# Altium PCB Motor Unit Rev 3.PcbDoc
Units mil, origin at the board's own origin, x right, y up, seen from the top; angles counter-clockwise.
Board outline 2000 x 3000 mil, 4 copper layers (Top Layer, 5V, GND, Bottom Layer), stack 23.756 mil thick; 85 components, 62 nets, 308 pads, 59 vias.
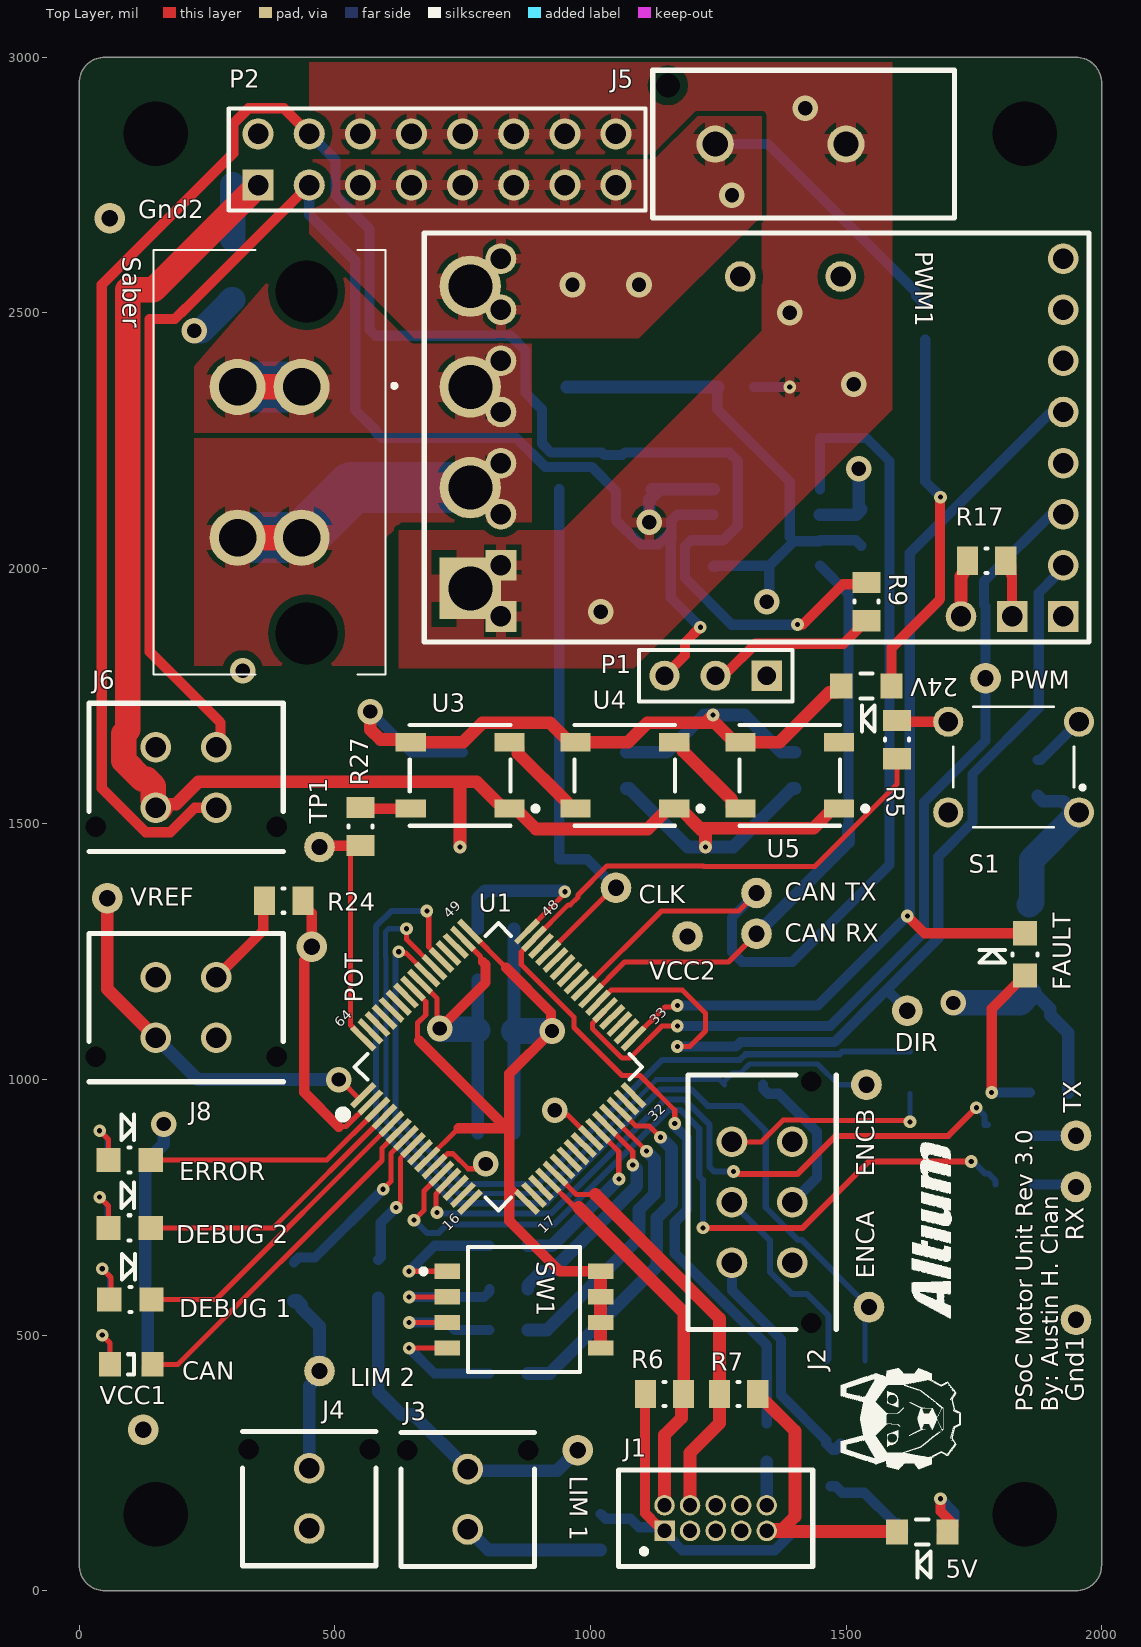
[diagram p0: Top Layer view]
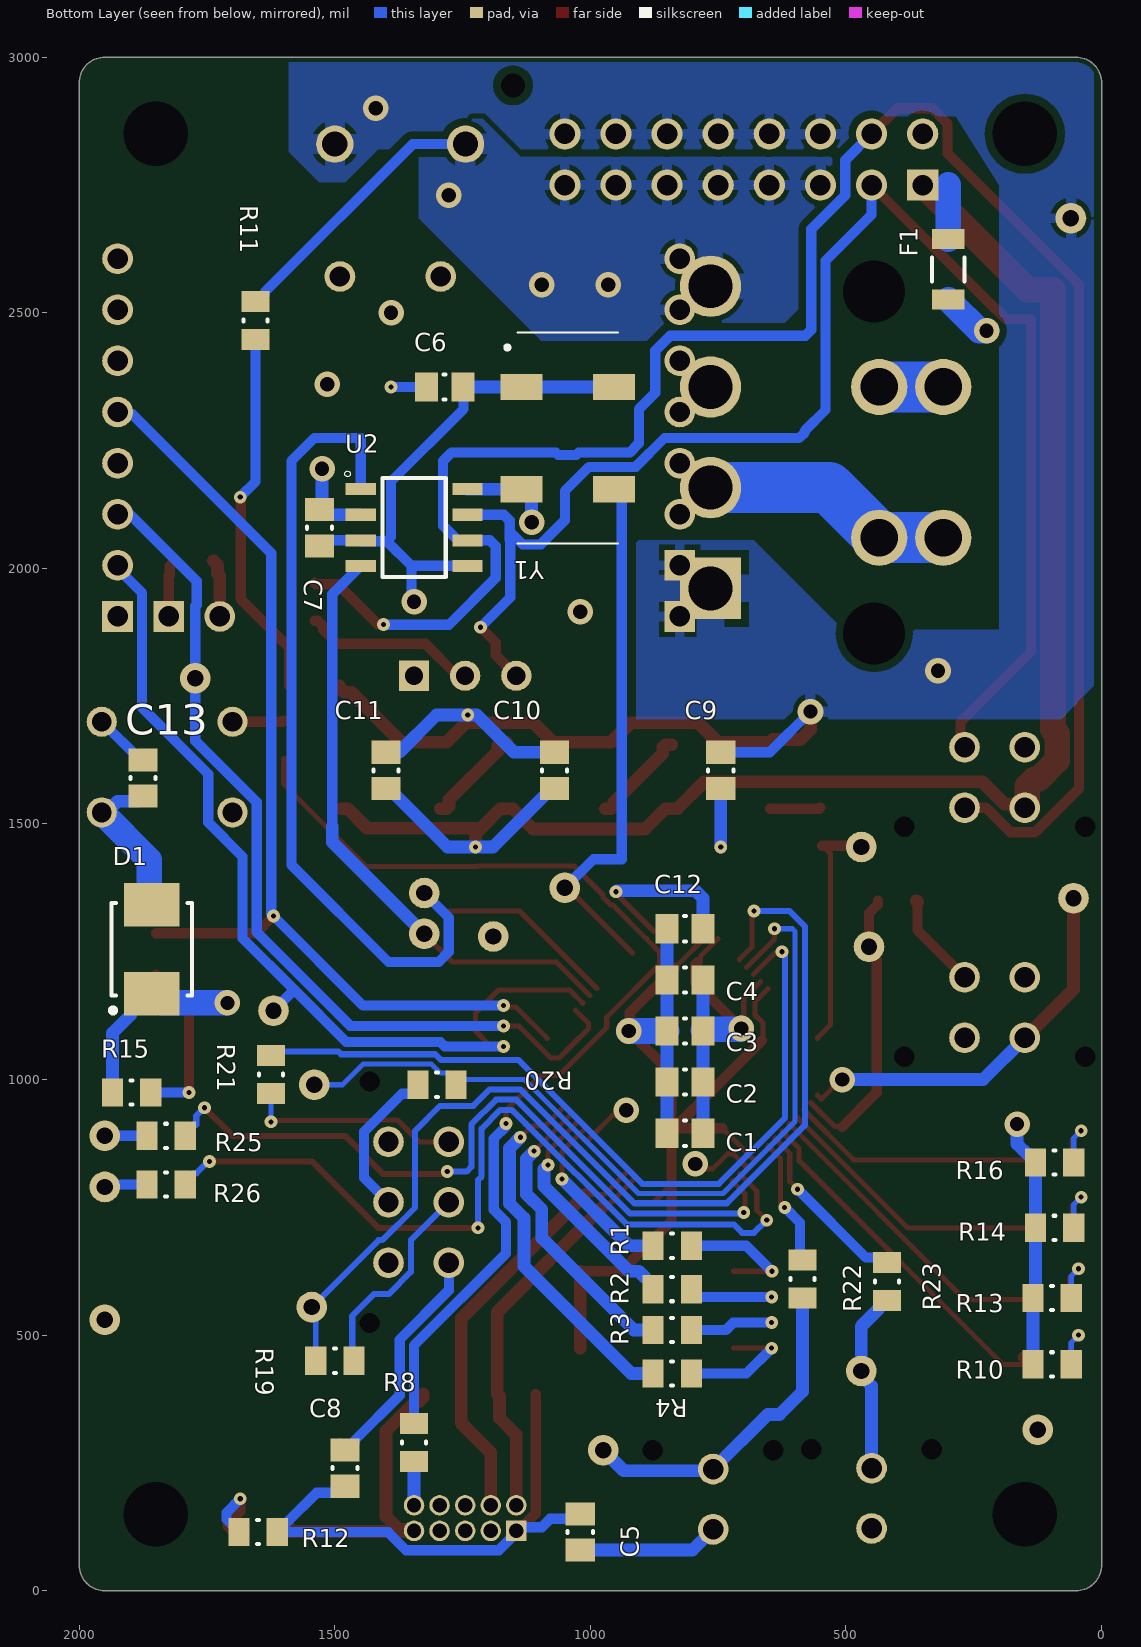
[diagram p1: Bottom Layer view, seen from below]
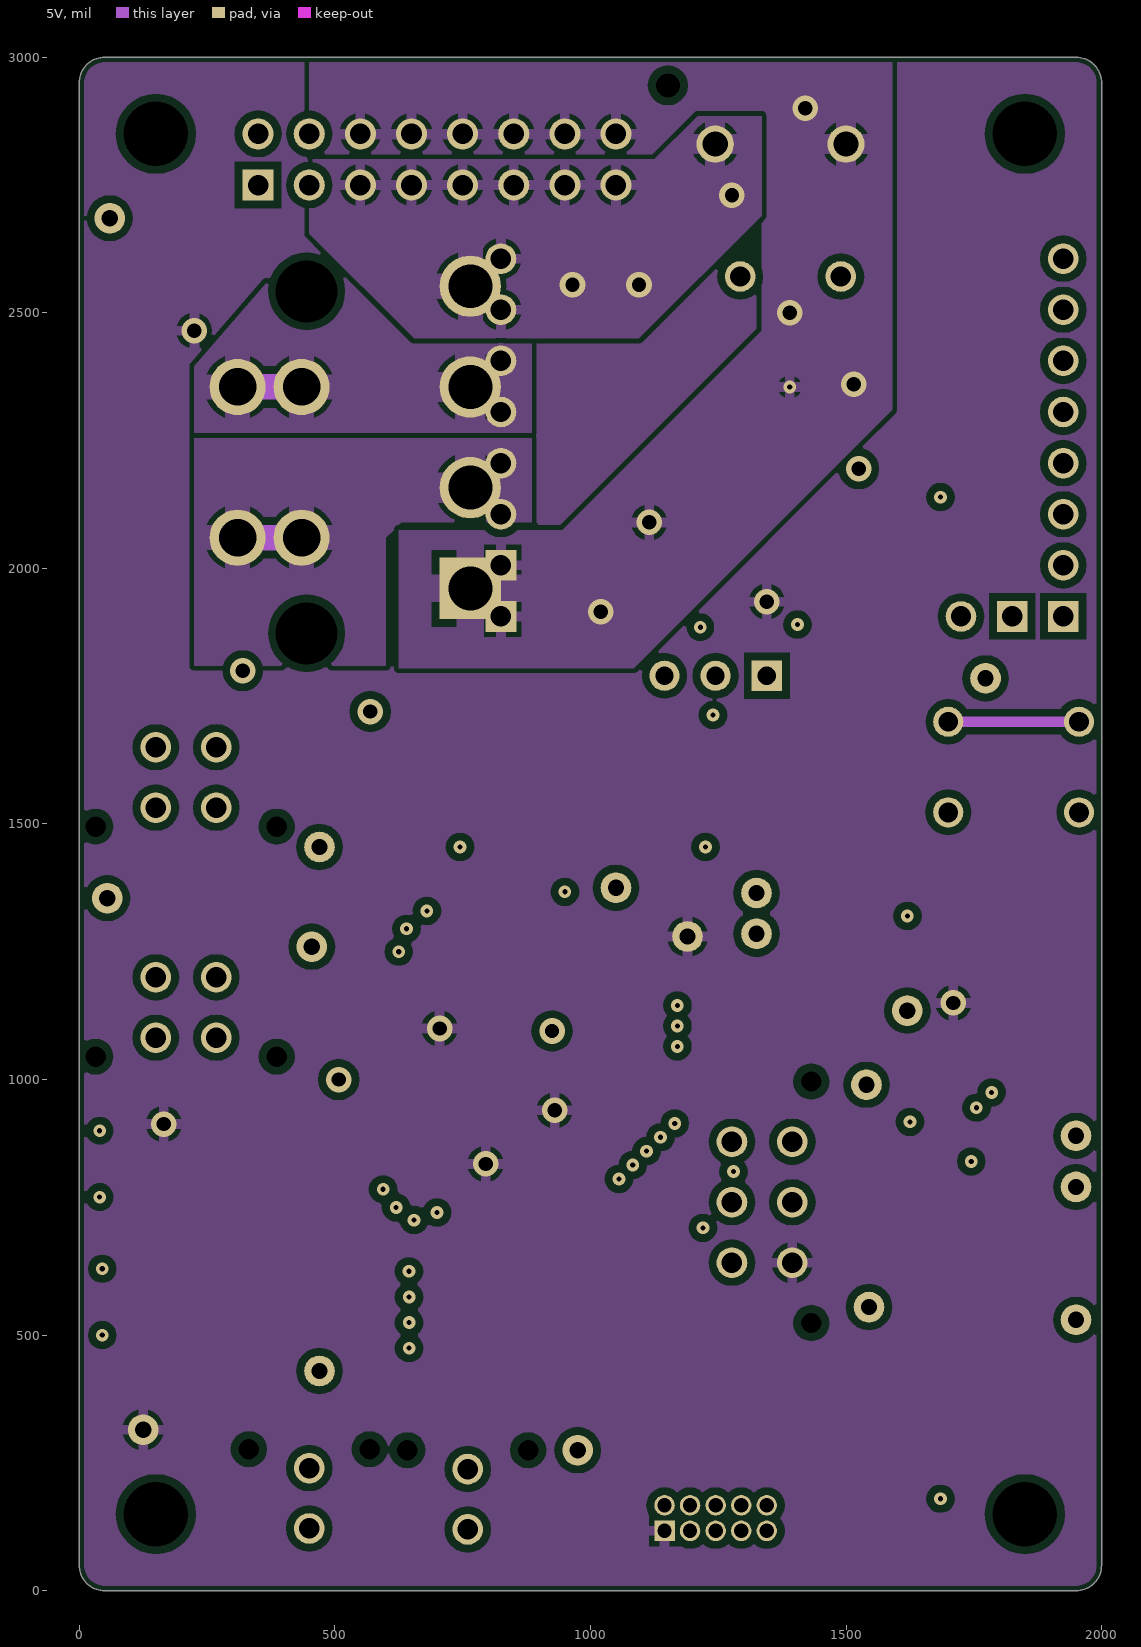
[diagram p2: 5V]
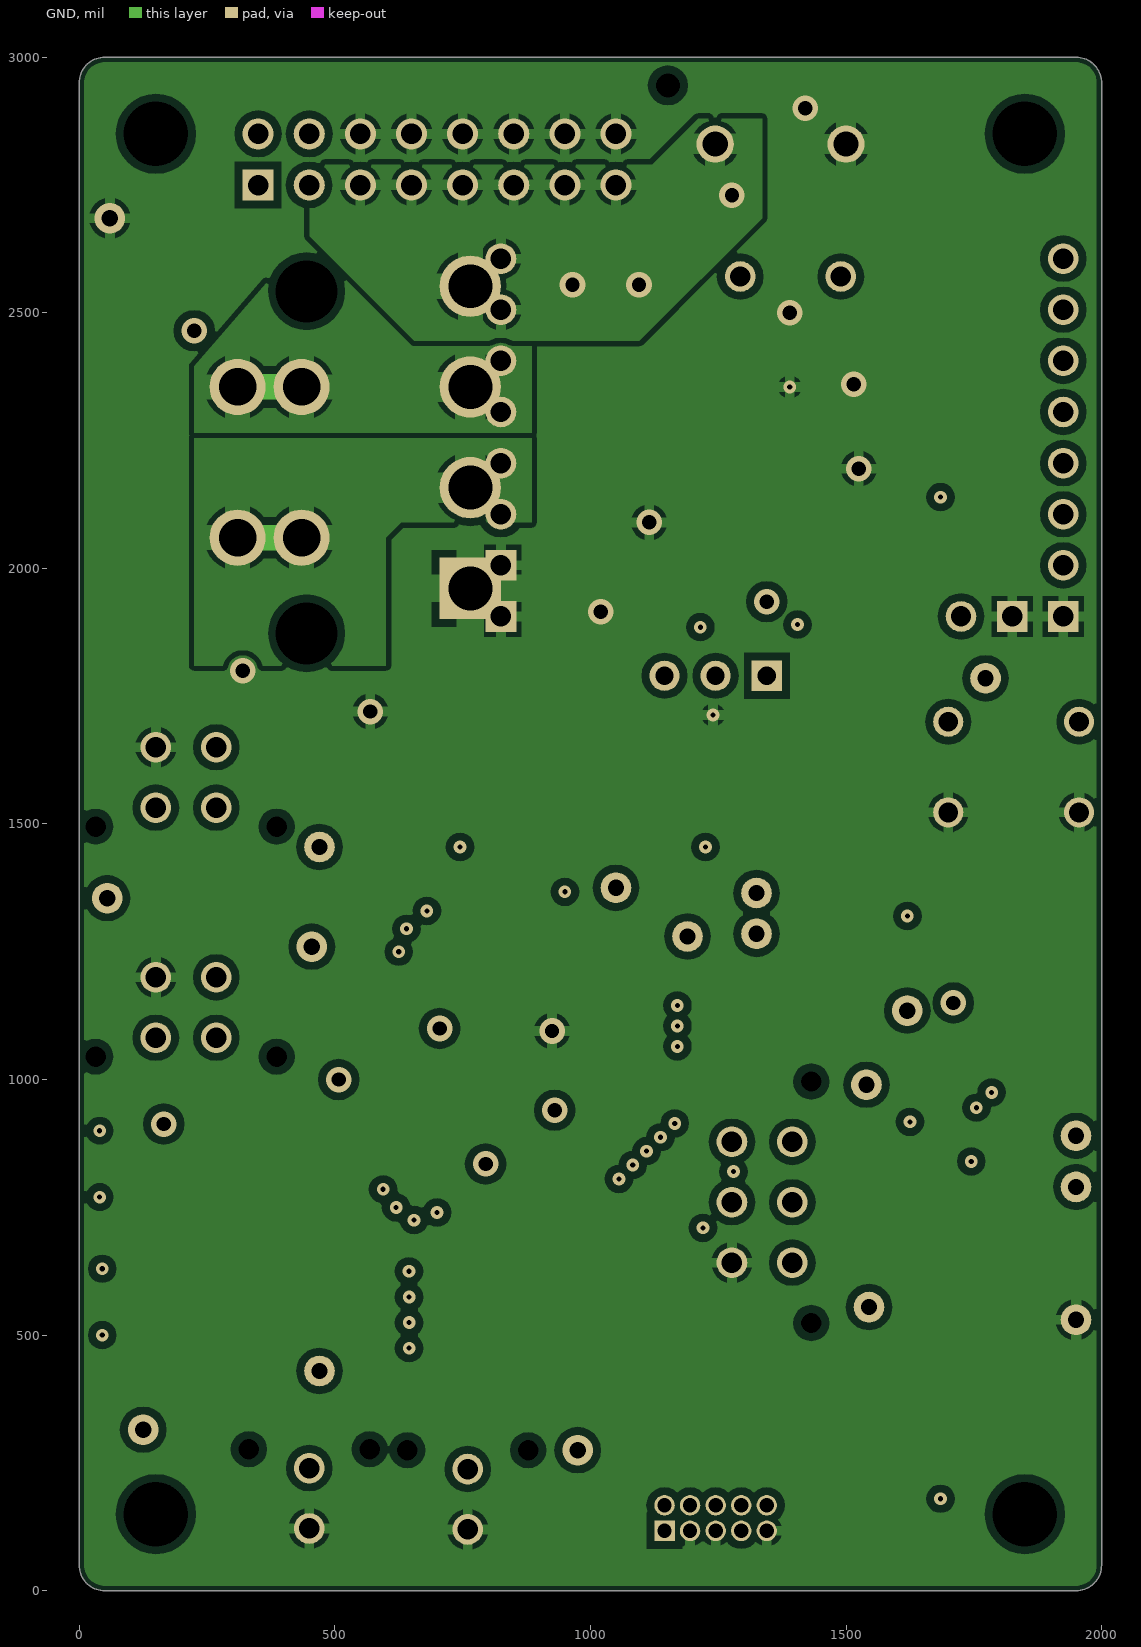
[diagram p3: GND]

## Layer stack, top to bottom
Top Solder: solder mask 0.4, Solder Resist, Dk 3.5
Top Layer: signal copper 1.4
Dielectric 2: prepreg 2.8, PP-006, Dk 4.1
5V: signal copper 1.3779
Dielectric 1: dielectric 12.6, FR-4, Dk 4.8
GND: signal copper 1.3779
Dielectric 3: prepreg 2.8, PP-006, Dk 4.1
Bottom Layer: signal copper 1.4
Bottom Solder: solder mask 0.4, Solder Resist, Dk 3.5

## Board outline
50,0 1950,0 ccw(c1950,50) 2000,50 2000,2950 ccw(c1950,2950) 1950,3000 50,3000 ccw(c50,2950) 0,2950 0,50 ccw(c50,50)

## Design rules (kind name [scope] priority, off if disabled: settings)
BoardOutlineClearance [All] p1: gap=10 ignorepadtopadclearanceinfootprint=FALSE
Clearance [All] p1: gap=5 ignorepadtopadclearanceinfootprint=TRUE except(0: Arc-Hole Track-Hole SMDPad-Hole THPad-Hole Via-Hole Fill-Hole Poly-Hole Region-Hole Text-Hole; 8: Track-Track Track-SMDPad Track-THPad Track-Via; 10: Poly-Poly; 15: Arc-Poly Track-Poly SMDPad-Poly THPad-Poly Via-Poly Fill-Poly)
ComponentClearance [All] p1: gap=0 collisioncheckmode=3 verticalgap=100000 showdistances=FALSE
Height [All] p1: minheight=0 maxheight=2000 prefheight=500
HoleSize [All] p1: absolutevalues=TRUE maxlimit=200 minlimit=10 maxpercent=80.000 minpercent=20.000
MinimumAnnularRing [All] p1: minimumring=6
MinimumSolderMaskSliver [All] p1: minsoldermaskwidth=5
PlaneConnect [All] p1: planeconnectstyle=Relief reliefexpansion=20 reliefentries=4 reliefconductorwidth=20 reliefairgap=10
PolygonConnect [All] p1: connectstyle=Relief reliefconductorwidth=20 reliefentries=4 polygonreliefangle="90 Angle" airgapwidth=10
RoutingVias [All] p1: holewidth=10 width=25 viastyle="Through Hole" minholewidth=10 minwidth=25 maxholewidth=28 maxwidth=50
SilkToSolderMaskClearance [IsPad] p1: minsilkscreentomaskgap=5 clearancetoexposedcopper=TRUE
SolderMaskExpansion [All] p1: expansion=4
Width [All] p1: maxlimit=200 minlimit=5 preferedwidth=25 minimp=50.000000 maximp=50.000000 favimp=50.000000
24 further rules are at their usual default settings.

## Classes and differential pairs
component class "Standard Header": C8 D1 ENCA ENCB F1 J2 J3 J4 J5 J6 J8 "LIM 1" "LIM 2" P2 POT R19 R20 R21 R22 R23 R24 R25 R26 RX TX VREF
component class "PSoC Connections": C1 C2 C3 C4 C5 C6 C12 C13 CLK Gnd1 Gnd2 J1 R5 R6 R7 R8 S1 U1 VCC1 VCC2 Y1
component class "Motor Controller": DIR PWM PWM1 R17 Saber
component class LEDs: 5V 24V C9 C10 C11 CAN "DEBUG 1" "DEBUG 2" ERROR FAULT R10 R11 R12 R13 R14 R15 R16 R27 TP1 U3 U4 U5
component class "DIP Switch": R1 R2 R3 R4 SW1
component class CAN: C7 "CAN RX" "CAN TX" P1 R9 U2

## Components (designator, comment, footprint, x,y, rotation, side; value= is the part's Value field where it differs from the comment)
5V "LTST-C170YKT" LTST-C170YKT_V 1649.21,115 r180 top
24V "LTST-C170YKT" LTST-C170YKT_V 1540,1770 r180 top
C1 "10uF" CAPC0805(2012)130_N 815,895 r180 bottom value=390pF
C2 "10uF" CAPC0805(2012)130_N 815,995 r180 bottom value=390pF
C3 ".1uF" CAPC0805(2012)130_N 815,1095 r180 bottom value=390pF
C4 ".1uF" CAPC0805(2012)130_N 815,1195 r180 bottom value=390pF
C5 ".1uF" CAPC0805(2012)130_N 1020,115 r90 bottom value=390pF
C6 ".1uF" CAPC0805(2012)130_N 1285,2355 r0 bottom value=390pF
C7 ".1uF" CAPC0805(2012)130_N 1530,2079.57 r270 bottom value=390pF
C8 ".1uF" CAPC0805(2012)130_N 1480,240 r90 bottom value=390pF
C9 ".1uF" CAPC0805(2012)130_N 745,1605 r270 bottom value=390pF
C10 ".1uF" CAPC0805(2012)130_N 1070,1605 r270 bottom value=390pF
C11 ".1uF" CAPC0805(2012)130_N 1400,1605 r270 bottom value=390pF
C12 "1uF" CAPC0805(2012)130_N 815,1295 r0 bottom value=390pF
C13 ".1uF" CAPC0805(2012)130_N 1875,1590 r270 bottom value=390pF
CAN "CAN" 0805_A 101.69,443 r180 top
"CAN RX" "Test Point" "Test Point Through-hole" 1300,1305 r270 top
"CAN TX" "Test Point" "Test Point Through-hole" 1350,1345 r90 top
CLK "Test Point" "Test Point Through-hole" 1070,1400 r180 top
D1 "5.1V" ONSC-SMB-2-403A-03_H_V 1858.17,1255 r90 bottom
"DEBUG 1" "LTST-C170GKT" LTST-C170GKT_V 100,570 r0 top
"DEBUG 2" "LTST-C170GKT" LTST-C170GKT_V 98.66,710 r0 top
DIR "Test Point" "Test Point Through-hole" 1600,1110 r0 top
ENCA "Test Point" "Test Point Through-hole" 1520,575 r270 top
ENCB "Test Point" "Test Point Through-hole" 1520,965 r0 top
ERROR "LTST-C170CKT" LTST-C170CKT_V 98.66,843 r0 top
F1 "250mA" BOUR-MF-NSMF150-2_V 300,2585 r90 bottom
FAULT "LTST-C170CKT" LTST-C170CKT_V 1850,1245 r90 top
Gnd1 "Test Point" "Test Point Through-hole" 1975,510 r90 top
Gnd2 "Test Point" "Test Point Through-hole" 85,2665 r90 top
J1 "SAMTEC-FTSH-105-01-X-D" SAMTEC-FTSH-105-01-X-D 1049.72,25.39 r0 top
J2 "Molex Micro" 0430450627 1335.95,700.95 r90 top
J3 "Molex micro-" 0430450227 760,120 r0 top
J4 "Molex micro-" 0430450227 450,121.89 r0 top
J5 "Molex 6.5MM  power connector" 1510482204 1732.2,2649.29 r90 top
J6 "Molex Micro" 0430450427 209.06,1591.06 r0 top
J8 "Molex Micro" 0430450427 209.05,1140.95 r0 top
"LIM 1" "Test Point" "Test Point Through-hole" 1000,255 r90 top
"LIM 2" "Test Point" "Test Point Through-hole" 490,455 r180 top
P1 "Header 3" HDR1X3 1345,1790 r180 top
P2 "TSW-108-20-F-D" SMTC-TSW-108-20-X-D 350,2750 r0 top
POT "Test Point" "Test Point Through-hole" 480,1240 r90 top
PWM "Test Point" "Test Point Through-hole" 1753,1760 r0 top
PWM1 "6.5V - 40V" Pololu_G2_Driver_24v21 1975,2656 r180 top locked
R1 "100R" RESC0805(2012)_N 840,675 r180 bottom value="120.00 Ohm"
R2 "100R" RESC0805(2012)_N 840,590 r180 bottom value="120.00 Ohm"
R3 "100R" RESC0805(2012)_N 840,510 r180 bottom value="120.00 Ohm"
R4 "100R" RESC0805(2012)_N 840,425 r180 bottom value="120.00 Ohm"
R5 "100R" RESC0805(2012)_N 1600,1665 r270 top value="120.00 Ohm"
R6 "47K" RESC0805(2012)_N 1145,385 r180 top value="120.00 Ohm"
R7 "47K" RESC0805(2012)_N 1290,385 r180 top value="120.00 Ohm"
R8 "100R" RESC0805(2012)_N 1345,290 r90 bottom value="120.00 Ohm"
R9 "120R" RESC0805(2012)_N 1540,1935 r90 top value="120.00 Ohm"
R10 "330R" RESC0805(2012)_N 96.77,443 r0 bottom value="120.00 Ohm"
R11 "2.2K" RESC0805(2012)_N 1655,2485 r90 bottom value="120.00 Ohm"
R12 "330R" RESC0805(2012)_N 1650,115 r180 bottom value="120.00 Ohm"
R13 "330R" RESC0805(2012)_N 96.77,573 r0 bottom value="120.00 Ohm"
R14 "330R" RESC0805(2012)_N 91.77,710 r0 bottom value="120.00 Ohm"
R15 "330R" RESC0805(2012)_N 1897.4,975 r0 bottom value="120.00 Ohm"
R16 "330R" RESC0805(2012)_N 91.77,838 r0 bottom value="120.00 Ohm"
R17 "47K" RESC0805(2012)_N 1775,2015 r0 top value="120.00 Ohm"
R19 "100R" RESC0805(2012)_N 1500,450 r0 bottom value="120.00 Ohm"
R20 "100R" RESC0805(2012)_N 1300,990 r180 bottom value="120.00 Ohm"
R21 "100R" RESC0805(2012)_N 1625,1010 r90 bottom value="120.00 Ohm"
R22 "100R" RESC0805(2012)_N 585,610 r90 bottom value="120.00 Ohm"
R23 "100R" RESC0805(2012)_N 420,605 r90 bottom value="120.00 Ohm"
R24 "1KR" RESC0805(2012)_N 400,1350 r0 top value="120.00 Ohm"
R25 "100R" RESC0805(2012)_N 1830,890 r0 bottom value="120.00 Ohm"
R26 "100R" RESC0805(2012)_N 1830,795 r0 bottom value="120.00 Ohm"
R27 "470R" RESC0805(2012)_N 550,1495 r90 top value="120.00 Ohm"
RX "Test Point" "Test Point Through-hole" 1925,810 r270 top
S1 "1825910-7" "Switch 6mm 24V (NO)" 1827.95,1611.42 r180 top
Saber "Saber" Saber 722.95,1698.62 r90 top
SW1 "TDA04H0SB1" CKCP-TDA04H0SB1R_V 870,550 r0 top
TP1 "Test Point" "Test Point Through-hole" 490,1480 r180 top
TX "Test Point" "Test Point Through-hole" 1925,910 r270 top
U1 "CY8C4248AZI-L485" TQFP50P1200X1200X160-64N 820,1025 r45 top
U2 "MCP2562-E/SN" SOIC127P600X175-8N 1345,2080 r180 bottom
U3 "WS2812B" ADAI-WS2812B_V 745,1595 r180 top
U4 "WS2812B" ADAI-WS2812B_V 1067.5,1595 r180 top
U5 "WS2812B" ADAI-WS2812B_V 1390,1595 r180 top
VCC1 "Test Point" "Test Point Through-hole" 150,295 r90 top
VCC2 "Test Point" "Test Point Through-hole" 1215,1260 r90 top
VREF "Test Point" "Test Point Through-hole" 80,1335 r90 top
Y1 "40MHZ" SG-636 1044.45,2255 r270 bottom

## Footprints (in the part's own frame and the unit in brackets; to place one, negate y for a bottom-side part, rotate by r counter-clockwise, add the part's x,y. Pads: shape width x height; smd on the part's side, far side on the other; paste and mask are expansions set on the pad)
0805_A [mm] "Chip LED, 2-Leads, Body 2.0x1.3mm, IPC Medium Density"
  rect 1.1x1.2 smd: 1(-1.05,0) 2(1.05,0)
  silkscreen extent -0.15,-0.5 0.15,0.5, body extent -1,-0.62 1,0.63, height 0.68
0430450227 [mil] "Molex Micro fit 3.0"
  round 60 hole 40: 1(0,0) 2(0,118.11)
  round 0 hole 40 unplated: ""(-118.11,155.12) ""(118.11,155.12)
  silkscreen extent -131,-73 131,190
0430450427 [mil] "Molex micro-fit 3.0 4 pos"
  round 60 hole 40: 1(-59.06,59.06) 2(-59.06,-59.06) 3(59.06,59.06) 4(59.06,-59.06)
  round 0 hole 40 unplated: 7(177.17,-96.06) ""(-177.17,-96.06)
  silkscreen extent -190,-145 190,145
0430450627 [mil] "Molex micro-fit 3.0 6 position"
  round 60 hole 40: 1(-59.06,59.06) 2(-59.06,-59.05) 3(59.05,59.06) 4(59.05,-59.05) 5(177.16,59.06) 6(177.16,-59.05)
  round 0 hole 40 unplated: 7(295.27,-96.06) ""(-177.17,-96.06)
  silkscreen extent -190,-145 308,145
1510482204 [mm]
  round 1.85 hole 1.25: 1(4.59,5.898) 2(4.59,12.398)
  round 0 hole 1.2 unplated: 9(7.51,14.748)
  Top Layer region: 5.746,3.673
  silkscreen extent 0.92,0.5 8.26,15.5
ADAI-WS2812B_V [mm] "SMD, 4-Leads, Body 5x5mm, Pitch 3.3mm"
  rect 1.5x0.9 smd: 1(-2.45,1.65) 2(-2.45,-1.65) 3(2.45,-1.65) 4(2.45,1.65)
  silkscreen extent -3.88,-2.5 2.5,2.5, body extent -2.7,-2.5 2.7,2.5, height 1.69
BOUR-MF-NSMF150-2_V [mm] "SMD, 2-Leads, Body 3.2x1.6mm"
  rect 1x1.6 smd: 1(-1.5,0) 2(1.5,0)
  silkscreen extent -0.6,-0.8 0.6,0.8, body extent -1.6,-0.8 1.6,0.8, height 0.55
CAPC0805(2012)130_N [mm] "Chip Capacitor, Body 2.0x1.2mm, Height 1.3mm, IPC Medium Density"
  rect 1.15x1.45 smd: 1(-0.9,0) 2(0.9,0)
  silkscreen extent -0.05,-0.62 0.05,0.62, body extent -1.1,-0.72 1.1,0.73, height 1.3
CKCP-TDA04H0SB1R_V [mm] "SMD, 8-Leads, Body 6.21x6.2mm, Pitch 1.27mm"
  rect 1.27x0.76 smd: 1(-3.81,1.905) 2(-3.81,0.635) 3(-3.81,-0.635) 4(-3.81,-1.905) 5(3.81,-1.905) 6(3.81,-0.635) 7(3.81,0.635) 8(3.81,1.905)
  silkscreen extent -5.12,-3.1 2.78,3.1, body extent -4.06,-3.1 4.06,3.11, height 2.3
HDR1X3 [mm] "Connector; Header; 3 Position"
  rect 1.5x1.5 hole 0.9: 1(0,0)
  round 1.5 hole 0.9: 2(2.54,0) 3(5.08,0)
  silkscreen extent -1.27,-1.27 6.35,1.27
LTST-C170CKT_V [mm] "SMD, 2-Leads, Body 2x1.25mm"
  rect 1.2x1.2 smd: 1(-1.05,0) 2(1.05,0)
  silkscreen extent -0.41,-0.62 0.23,2.25, body extent -1,-0.63 1,0.63, height 1.1
LTST-C170GKT_V [mm] "SMD, 2-Leads, Body 2x1.25mm"
  rect 1.2x1.2 smd: 1(-1.05,0) 2(1.05,0)
  silkscreen extent -0.41,-0.62 0.23,2.25, body extent -1,-0.63 1,0.63, height 1.1
LTST-C170YKT_V [mm] "SMD, 2-Leads, Body 2x1.25mm"
  rect 1.1x1.25 smd: 1(-1.25,0) 2(1.25,0)
  silkscreen extent -0.41,-0.62 0.3,2.25, body extent -1,-0.63 1,0.63, height 1.1
ONSC-SMB-2-403A-03_H_V [mil] "Molded, 2-Leads, Body 4.6x3.95mm"
  rect 85x107.99 smd: 1(-87.01,0) 2(87.01,0)
  silkscreen extent -125,-79 91,81, body extent -91,-78 91,78, height 95
Pololu_G2_Driver_24v21 [mil] "Pololu G2 High-Power Motor Driver 24v21"
  rect 120x120 hole 86: 1(1210,695)
  rect 60x60 hole 40: 1a(1150,750) 1b(1150,650) 14(50,750) 15(150,750)
  round 120 hole 86: 2(1210,498) 3(1210,301) 4(1210,104)
  round 60 hole 40: 2a(1150,550) 2b(1150,450) 3a(1150,350) 3b(1150,250) 4a(1150,150) 4b(1150,50) 5(682,85) 6(485,85) 7(50,50) 8(50,150) 9(50,250) 10(50,350) 11(50,450) 12(50,550) 13(50,650) 16(250,750)
  silkscreen extent 0,0 1300,800
RESC0805(2012)_N [mm] "Chip Resistor, Body 2.0x1.3mm, IPC Medium Density"
  rect 1.05x1.4 smd: 1(-0.95,0) 2(0.95,0)
  silkscreen extent -0.05,-0.6 0.05,0.6, body extent -1.1,-0.67 1.1,0.68, height 0.7
Saber [mm]
  round 2.79 hole 1.86: 1A(16.672,7.314) 1B(16.672,10.494) 2A(9.182,7.314) 2B(9.182,10.494)
  round 0 hole 3.08 unplated: ""(4.432,7.064) ""(21.422,7.064)
  silkscreen extent 2.39,2.6 23.47,14.68
SAMTEC-FTSH-105-01-X-D [mil]
  rect 40x40 hole 28 mask+3: 1(95.28,91.77)
  round 40 hole 28 mask+3: 2(95.28,141.77) 3(145.28,91.77) 4(145.28,141.77) 5(195.28,91.77) 6(195.28,141.77) 7(245.28,91.77) 8(245.28,141.77) 9(295.28,91.77) 10(295.28,141.77)
  silkscreen extent 5,22 385,211
SG-636 [mm]
  rect 1.3x2.1 smd: 1(-2.54,-2.3) 2(2.54,-2.3) 3(2.54,2.3) 4(-2.54,2.3)
  silkscreen extent -5.25,-3.1 5.25,2.5
SMTC-TSW-108-20-X-D [mm] ".025 SQ Post Terminal Strip Assembly, 2x8 Pins, Vertical, 2.54mm Pitch, Male"
  rect 1.55x1.55 hole 1.02: 1(0,0)
  round 1.55 hole 1.02: 2(0,2.54) 3(2.54,0) 4(2.54,2.54) 5(5.08,0) 6(5.08,2.54) 7(7.62,0) 8(7.62,2.54) 9(10.16,0) 10(10.16,2.54) 11(12.7,0) 12(12.7,2.54) 13(15.24,0) 14(15.24,2.54) 15(17.78,0) 16(17.78,2.54)
  silkscreen extent -1.46,-1.27 19.24,3.81, body extent -1.27,-1.27 19.05,3.81, height 28.45
SOIC127P600X175-8N [mm]
  rect 1.5x0.6 smd: 1(-2.65,1.905) 2(-2.65,0.635) 3(-2.65,-0.635) 4(-2.65,-1.905) 5(2.65,-1.905) 6(2.65,-0.635) 7(2.65,0.635) 8(2.65,1.905)
  silkscreen extent -3.44,-2.45 1.58,2.81
"Switch 6mm 24V (NO)" [mm]
  round 1.498 hole 0.99: 1(-3.25,2.25) 2(3.25,2.25) 3(-3.25,-2.25) 4(3.25,-2.25)
  silkscreen extent -3.53,-3 3,3
"Test Point Through-hole" [mil]
  round 60 hole 32: 1(20,25)
TQFP50P1200X1200X160-64N [mm]
  rect 1.55x0.3 smd mask+0: 1(-5.75,3.75) 2(-5.75,3.25) 3(-5.75,2.75) 4(-5.75,2.25) 5(-5.75,1.75) 6(-5.75,1.25) 7(-5.75,0.75) 8(-5.75,0.25) 9(-5.75,-0.25) 10(-5.75,-0.75) 11(-5.75,-1.25) 12(-5.75,-1.75) 13(-5.75,-2.25) 14(-5.75,-2.75) 15(-5.75,-3.25) 16(-5.75,-3.75) 33(5.75,-3.75) 34(5.75,-3.25) 35(5.75,-2.75) 36(5.75,-2.25) 37(5.75,-1.75) 38(5.75,-1.25) 39(5.75,-0.75) 40(5.75,-0.25) 41(5.75,0.25) 42(5.75,0.75) 43(5.75,1.25) 44(5.75,1.75) 45(5.75,2.25) 46(5.75,2.75) 47(5.75,3.25) 48(5.75,3.75)
  rect 0.3x1.55 smd mask+0: 17(-3.75,-5.75) 18(-3.25,-5.75) 19(-2.75,-5.75) 20(-2.25,-5.75) 21(-1.75,-5.75) 22(-1.25,-5.75) 23(-0.75,-5.75) 24(-0.25,-5.75) 25(0.25,-5.75) 26(0.75,-5.75) 27(1.25,-5.75) 28(1.75,-5.75) 29(2.25,-5.75) 30(2.75,-5.75) 31(3.25,-5.75) 32(3.75,-5.75) 49(3.75,5.75) 50(3.25,5.75) 51(2.75,5.75) 52(2.25,5.75) 53(1.75,5.75) 54(1.25,5.75) 55(0.75,5.75) 56(0.25,5.75) 57(-0.25,5.75) 58(-0.75,5.75) 59(-1.25,5.75) 60(-1.75,5.75) 61(-2.25,5.75) 62(-2.75,5.75) 63(-3.25,5.75) 64(-3.75,5.75)
  silkscreen extent -7.33,-5.05 5.05,5.05, body extent -5.12,-5.12 5.12,5.12, height 1.6

## Part data
5V 24V: library part CMP-1674-00003-5, "LED Uni-Color Yellow, 60 mW, 80 mA, -55 to 85 degC, 2-Pin SMD, RoHS, Tape and Reel", Colour=Yellow, Manufacturer=Lite-On, Max Operating Temperature="85 degC", Min Operating Temperature="-55 degC", Package Quantity=3000, ComponentLink1Description="Manufacturer URL", ComponentLink1URL=http://www.us.liteon.com/, ComponentLink2Description=Datasheet, ComponentLink2URL="http://media.digikey.com/pdf/Data Sheets/Lite-On PDFs/LTST-C170YKT.pdf", DatasheetVersion=03/2000, Height="1.1 mm", Length="2 mm", Mount="Surface Mount", Mounting Technology="Surface Mount", PackageDescription="2-Pin Surface Mount Device, Body 2 x 1.25 mm", PackageReference=C170YKT, Packaging="Tape and Reel", Pins=2, RoHSCompliant=true
C1 C2 C3 C4 C5 C6 C7 C8 C9 C10 C11 C12 C13: library part CMP-1036-02603-1, "CAP 390pF 200V ±5% 0805 (2012 Metric) Thickness 1.3mm SMD", Case-EIA=0805, Case-Metric=2012, Rated Voltage="200 V", Tolerance=±5%, Max Thickness="1.3 mm", Technology=SMT
CAN: library part CMP-1426-00008-1, "SMD mono-color Chip LED, WL-SMCW, Blue", Color=Blue, Manufacturer="Wuerth Elektronik", PartNumber=150080BS75000, ComponentLink1Description="Manufacturer URL", ComponentLink1URL=http://www.we-online.com, ComponentLink2Description=Datasheet, ComponentLink2URL=http://katalog.we-online.com/led/datasheet/150080BS75000.pdf, PackageReference=0805_A
D1: library part CMP-1060-00195-1, "3 W Zener Voltage Regulator, 2-Pin SMB, Pb-Free, Tape and Reel", Manufacturer="On Semiconductor", PartNumber=1SMB5917BT3G, ComponentLink1Description="Manufacturer URL", ComponentLink1URL=http://www.onsemi.com/, ComponentLink2Description=Datasheet, ComponentLink2URL=http://www.onsemi.com/pub_link/Collateral/1SMB5913BT3-D.PDF, ComponentLink3Description="Package Specification", ComponentLink3URL=http://www.onsemi.com/pub_link/Collateral/1SMB5913BT3-D.PDF, DatasheetVersion="Rev. 8", Mounting Technology="Surface Mount", PackageDescription="2-Pin Small Molded Package, J-Bend Lead, Body 4.33 x 3.625 mm", PackageReference=SMB-2-403A-03_H, PackageVersion="Rev. H, 05/2011", Packing="Tape and Reel", RoHS=Pb-Free, VZ Typ (V)=4.7
"DEBUG 1" "DEBUG 2": library part CMP-1674-00002-5, "LED Uni-Color Green, 100 mW, 120 mA, -55 to 85 degC, 2-Pin SMD, RoHS, Tape and Reel", Colour=Green, Manufacturer=Lite-On, Max Operating Temperature="85 degC", Min Operating Temperature="-55 degC", Package Quantity=1, ComponentLink1Description="Manufacturer URL", ComponentLink1URL=http://www.us.liteon.com/, ComponentLink2Description=Datasheet, ComponentLink2URL=http://media.digikey.com/pdf/Data%20Sheets/Lite-On%20PDFs/LTST-C170GKT.pdf, DatasheetVersion=03/2003, Height="1.1 mm", Length="2 mm", Mount="Surface Mount", Mounting Technology="Surface Mount", PackageDescription="2-Pin Surface Mount Device, Body 2 x 1.25 mm", PackageReference=C170GKT, Packaging="Tape and Reel", Pins=2, RoHSCompliant=true
ERROR FAULT: library part CMP-1674-00001-5, "LED Uni-Color Red, 100 mW, 200 mA, -55 to 85 degC, 2-Pin SMD, RoHS, Tape and Reel", Colour=Red, Manufacturer=Lite-On, Max Operating Temperature="85 degC", Min Operating Temperature="-55 degC", Package Quantity=3000, ComponentLink1Description="Manufacturer URL", ComponentLink1URL=http://www.us.liteon.com/, ComponentLink2Description=Datasheet, ComponentLink2URL=http://media.digikey.com/pdf/Data%20Sheets/Lite-On%20PDFs/LTST-C170CKT.pdf, DatasheetVersion=03/2003, Height="1.1 mm", Length="2 mm", Mount="Surface Mount", Mounting Technology="Surface Mount", PackageDescription="2-Pin Surface Mount Device, Body 2 x 1.25 mm", PackageReference=C170CKT, Packaging="Tape and Reel", Pins=2, RoHSCompliant=true
F1: library part CMP-2000-06693-1, "PTC Resettable Fuse, 6 V, 100 A, -40 to 85 degC, 2-Pin SMD, RoHS, Tape and Reel", Current Rating=100A, Hold Current=1.5A, Manufacturer=Bourns, Maximum Voltage=6VDC, Maximum Voltage DC=6V, Operating Temperature Range=-40Cto+85C, Package / Case=1206(3216metric), Package Description="2-Pin Surface Mount Device, Body 3.2 x 1.6 mm", Package Reference=MF-NSMF150-2, Resistance=130mOhms, Trip Current=3A, Brand=Bourns, Current Rating (Max)=100A, Current Rating - Max=100A, Datasheet URL=http://www.bourns.com/docs/Product-Datasheets/mfnsmf.pdf, Datasheet Version="Rev. T, 08/2015", Dimensions=3.4mmLx1.8mmWx0.7mmH, Factory Pack Quantity=3000, Manufacturer URL=http://www.bourns.com/, Mounting Style=SMD/SMT, Mounting Technology=SurfaceMount, Packaging=Reel, Product Category=ResettableFuses-PPTC, RoHS=Details, Series=MF-NSMF, Termination Style=SMD/SMT, Tradename=Multifuse, Type=PTCResettableFuses
J2: library part "Molex micro-fit 6-pin (single row schematic)", "Molex micro-fit 3.0 dual row connector. P/N 0430450627"
J3 J4: library part "Molex micro-fit 2-pin", "Molex micro-fit 3.0. Molex P/N 0430450227"
J6 J8: library part "Molex micro-fit 4-pin (Single row schematic)", "Molex micro-fit 3.0 dual row header. P/N 0430450427"
P1: "Header, 3-Pin", LatestRevisionDate=17-Jul-2002, LatestRevisionNote="Re-released for DXP Platform.", Publisher="Altium Limited"
P2: library part CMP-1024-00413-1, Manufacturer=Samtec, Temperature Range="-55 to 125 degC", ComponentLink1Description="Manufacturer URL", ComponentLink1URL=http://www.samtec.com, ComponentLink2Description=Datasheet, ComponentLink2URL=http://www.samtec.com/documents/webfiles/pdf/TSW_TH.PDF, ComponentLink3Description="Package Specification", ComponentLink3URL=http://www.samtec.com/documents/webfiles/cpdf/TSW-XXX-XX-XXX-X-XX-XXX-MKT.pdf, DatasheetVersion=F-214, Mounting Technology=Through-hole, Orientation=Vertical, PackageDescription=".025[0.64] SQ. Post Terminal Strip Assembly", PackageReference=TSW-108-20-X-D, PackageVersion="DM, 8/1988", PartNumber=TSW-108-20-F-D, Pitch="2.54 mm", RoHS=True
PWM1: library part "Pololu G2 High-Power Motor Driver 24v21", "This discrete MOSFET H-bridge motor driver enables bidirectional control of one high-power DC brushed motor. The small 1.3? × 0.8? board supports a wide 6.5 V to 40 V voltage range and is efficient enough to deliver a continuous 21 A without a heat sink. Additional features of this second-generation (G2) driver include reverse-voltage protection along with basic current sensing and current limiting functionality.", ComponentLink1Description="Product Info", ComponentLink1URL=https://www.pololu.com/product/2995/specs
R1 R2 R3 R4 R5 R7 R8 R9 R10 R11 R12 R13 R14 R15 R16 R17 R19 R20 R21 R22 R23 R25 R26 R27: library part "120R 5% 0805", "120R 0.125W 5% 0805 (2012 Metric)  SMD", Case-EIA=0805, Case-Metric=2012, Power="0.125 W", Tolerance="5 %", Technology=SMT
R6: library part "120R 5% 0805", "4.7K", Case-EIA=0805, Case-Metric=2012, Power="0.125 W", Tolerance="5 %", Technology=SMT
R24: library part "120R 5% 0805", Case-EIA=0805, Case-Metric=2012, Power="0.125 W", Tolerance="5 %", Technology=SMT
S1: library part "Switch 6mm 24V (NO)", "FSM4JAH=6MM TACT SWITCH, HIGH TEMP", Contact_Current_Rating="50 mA", Package=None, Configuration_Pole-Throw="Single Pole - Single Throw", Digi-Key_Part_Number=450-1804-ND, Digi-Key_Purchase_URL=https://www.digikey.com/product-detail/en/te-connectivity-alcoswitch-switches/1825910-7/450-1804-ND/1731414?utm_source=snapeda&utm_medium=aggregator&utm_campaign=symbol, EU_RoHS_Compliance=Compliant, MF="TE Connectivity", MP=1825910-7, SnapEDA_Link=https://www.snapeda.com/parts/1825910-7/TE%20Connectivity%20ALCOSWITCH%20Switches/view-part/?ref=snap, TE_purchase_URL=https://www.te.com/usa-en/product-1825910-7.html?te_bu=Cor&te_type=disp&te_campaign=seda_glo_cor-seda-global-disp-prtnr-fy19-seda-model-bom-cta_sma-317_1&elqCampaignId=32493
SW1: library part "SMD Half-Pitch Dip Switch Array", "Ultra-Miniature Surface Mount Half-Pitch DIP Switch, 25 mA, 24 V, -40 to 85 degC, 8-Pin SMD, RoHS, Tube", Case\Package=DIP, Contact Current Rating="100 mA", Max Contact Resistance="100 mohm", Max Current Rating="25 mA", Max Operating Temperature="85 degC", Max Voltage Rating (DC)="24 V", Min Operating Temperature="-40 degC", Package Quantity=70, ComponentLink1Description=Datasheet, ComponentLink1URL=http://www.ck-components.com/media/1328/tda.pdf, Contact Finish=Gold, Contact Material=Copper, Contact Plating=Gold, Current Rating="100 mA", DatasheetVersion=02/2016, Height="2.3 mm", Lead Pitch="1.27 mm", Length="6.21 mm", Mount="Surface Mount", Mounting Technology="Surface Mount", PackageDescription="8-Pin Surface Mount Device, Body 6.21 x 6.2 mm, Pitch 1.27 mm", PackageReference=TDA04H0SB1R, Packaging=Rail/Tube, Pins=4, Radiation Hardening=No, REACH SVHC="No SVHC", RoHSCompliant=true, Throw Configuration=SPST, Voltage Rating (DC)="24 V"
U2: "Microchip MCP2562-E/SN, CAN Transceiver 1MBps 1-channel IEC 61000-4-2, 8-Pin SOIC", Package="SO-8 Microchip", Availability=Unavailable, MF=Microchip, MP=MCP2562-E/SN, Price=None, SnapEDA_Link=https://www.snapeda.com/parts/MCP2562-E/SN/Microchip/view-part/?ref=snap
U3 U4 U5: library part CMP-1740-00005-1, "Intelligent Control LED Integrated Light Source, 3.5 to 5.3 V, -25 to 80 degC, 4-Pin SMD, RoHS, Bulk", Case\Package=Radial, Current Rating="240 mA", Max Operating Temperature="125 degC", Min Operating Temperature="-55 degC", Package Quantity=200, Tolerance=10%, ComponentLink1Description="Manufacturer URL", ComponentLink1URL=https://www.adafruit.com/, ComponentLink2Description=Datasheet, ComponentLink2URL=https://cdn-shop.adafruit.com/datasheets/WS2812B.pdf, DatasheetVersion=May-13, Height="12.2 mm", Lead Pitch="5 mm", Length="12.2 mm", Mount="Through Hole", PackageDescription="4-Pin Surface Mount Device, Body 5 x 5 mm, Pitch 3.3 mm", PackageReference=WS2812B, Packaging=Bulk, Pins=2, Radiation Hardening=No, REACH SVHC="No SVHC", RoHSCompliant=true, Shielding=Unshielded
Y1: library part SG-636, "Standard Clock Oscillators 50MHz 3.3Volt 100ppm -20C +70C", Arrow Part Number="SG-636PCW 50.0000MC3: ROHS", Manufacturer_Name="Epson Timing", Datasheet Link=http://www.mouser.com/ds/2/137/G-636PCE_en-1003252.pdf, Manufacturer_Part_Number="SG-636PCW 50.0000MC3: ROHS"
U1: Part_Number=CY8C4248AZI-L485

## Free pads (board coordinates)
  oval 89x60 hole 125.98: 2(150,2850) 3(150,150)
  round 60 hole 125.98: 3(1850,150) 3(1850,2850)

## Via types
v1: diameter 25, hole 10, Top Layer to Bottom Layer, 39 vias
v2: diameter 50, hole 28, Top Layer to Bottom Layer, 20 vias

## Nets (pads, with @x,y where several pads share a name; then routed paths per layer and width w, separated by ;. In a path a pad name is that pad's centre, name@x,y a point inside that pad or via, vN(x,y) a via of type N, cw(c..) or ccw(c..) an arc to the next point about the centre after c; other vN are vias at no path point)
24V: J5.2 P2.5 P2.7 P2.9 P2.11 P2.13 P2.15 PWM1.4 PWM1.4a PWM1.4b R11.2 | length 542.4
  Bottom Layer w20: J5.2 1347.4,2830 1637.44,2539.96 1637.44,2533.07 1648.11,2522.4 R11.2
  other v2: 965,2555 1095,2555 1276.89,2730
+5: C9.2 C10.2 C11.2 F1.2 J6.2 P2.1 U3.1 U4.1 U5.1 | length 3642.6
  Top Layer w25: J6.2@158.11,1532.01 164.81,1538.7 189.56,1538.7 233.36,1582.51 740,1582.51 ; v1(745,1455) 745,1577.51 740,1582.51 ; v1(1225,1455) 1225,1480.81 1213.98,1491.82 ; U5.1 1474.64,1530.04 1436.43,1491.82 1225,1491.82 1213.98,1491.82 ; 740,1582.51 777.18,1582.51 829.65,1530.04 U3.1 853.27,1530.04 893.31,1490 1112.11,1490 1152.15,1530.04 U4.1 1175.77,1530.04 1213.98,1491.82
  Top Layer w50: J6.2@158.11,1532.01 145,1545.12 145,1574.13 132.01,1587.12 123.9,1587.12 87,1624.02 87,1676.21 95.11,1684.32 95.11,2545.11 145.11,2545.11 P2.1
  Bottom Layer w25: v1(745,1455) C9.2 ; C10.2 1075.91,1569.57 1190.47,1455 v1(1225,1455) 1279.53,1455 1394.09,1569.57 C11.2
  Bottom Layer w50: F1.2 300,2750
"CAN H": J6.3 P1.3 P2.3 U2.7 | length 3009.8
  Top Layer w20: J6.3@276.22,1650.12 276.22,1698.78 138.11,1836.89 138.11,2488.11 187.3,2488.11 207.19,2508 208,2508 P2.3 ; P1.3 1185,1830 1185,1855 v1(1215,1885)
  Bottom Layer w20: P2.3 450,2691.8 540,2601.8 540,2310 580,2270 580,2266.72 591.72,2255 855,2255 911.41,2198.59 1002.69,2198.59 1049.94,2151.34 1049.94,2094.25 1097.19,2047 1132.81,2047 1158,2072.19 ; v1(1215,1885) 1157,1943 1157,2054.88 1158,2055.88 1158,2072.19 ; U2.7 1169.72,2105 1158,2093.28 1158,2072.19
"CAN L": J6.4 P2.4 R9.2 U2.6 | length 3961.4
  Top Layer w20: J6.4 225.99,1532.01 177.99,1484.01 130.12,1484.01 44,1570.12 44,2554.81 301.49,2812.3 301.49,2870.09 331.39,2900 400,2900 P2.4 P2.4@444.2,2844.2 ; v1(1405,1890) 1405.96,1890.96 1415.96,1890.96 1494.16,1969.16 1536.75,1969.16 R9.2
  Bottom Layer w20: P2.4 501.49,2798.51 501.49,2729.91 568,2663.39 568,2466.72 579.72,2455 843.88,2455 873,2425.88 873,2343.51 905.1,2311.41 905.1,2244.49 923.01,2226.59 1022.6,2226.59 1027.19,2222 1062.81,2222 1067.4,2226.59 1271.89,2226.59 1288.2,2210.28 1288.2,2083.2 1261.81,2056.81 1260.2,2056.81 1258.39,2055 U2.6 1196.72,2055 1185,2043.28 1185,1981.72 1276.72,1890 v1(1405,1890)
"CAN RX": "CAN RX.1" U1.39 U2.4 | length 1191.7
  Top Layer w10: U1.39 1066.76,1230 1270,1230 1325,1285
  Bottom Layer w20: U2.4 1505,1949.33 1505,1495
  Bottom Layer w25: 1325,1285 1505,1465 1505,1495
"CAN TX": "CAN TX.1" U1.40 U2.1 | length 1989.6
  Top Layer w10: U1.40 1138.92,1330 1290,1330 1325,1365
  Bottom Layer w20: 1325,1365 1277,1317 1277,1249.88 1296.88,1230 1395,1230 1585,1420 1585,2210 1540,2255 1449.33,2255 U2.1
Dip1: R1.1 U1.27 | length 343.4
  Top Layer w10: U1.27 1055.39,859.2 1055.39,806.18 v1(1055.79,805.79)
  Bottom Layer w25: R1.1 925,675 v1(1055.79,805.79)
Dip2: R2.1 U1.28 | length 448.8
  Top Layer w10: U1.28 1082.89,859.54 v1(1082.89,832.89)
  Bottom Layer w25: R2.1 877.4,596.89 905.45,624.94 924.44,624.94 1090.79,791.29 1090.79,825 v1(1082.89,832.89)
Dip3: R3.1 U1.29 | length 576.5
  Top Layer w10: U1.29@1042.49,927.34 1080.53,889.3 1080.7,889.3 v1(1110,860)
  Bottom Layer w25: R3.1 915,510 1094.98,689.98 1094.98,745.99 1125.39,776.4 1125.39,844.61 v1(1110,860)
Dip4: R4.1 U1.30 | length 715.3
  Top Layer w10: U1.30 1088.81,909.3 1114.91,909.3 v1(1137.11,887.11)
  Bottom Layer w25: R4.1 920,425 1129.98,634.98 1129.98,729.28 1158.39,757.69 1158.39,865.82 v1(1137.11,887.11)
DIR: DIR.1 PWM1.13 U1.38 | length 1881.9
  Top Layer w10: U1.38@1014.87,1149.17 U1.38 1015.97,1150.27 1040.81,1175.11 1179.89,1175.11 1225,1130 1225,1095 1195,1065 v1(1170,1065)
  Bottom Layer w20: v1(1170,1065) 1284.98,1065 1293.54,1073.56 1477.76,1073.56 1579.6,1175.4 ; DIR.1 1579.6,1175.4 ; PWM1.13@1920.43,2010 1935,2010 PWM1.13@1911.43,1986.43 ; PWM1.13 1920.43,2001.43 1911.43,2001.43 PWM1.13@1911.43,1986.43 ; 1579.6,1175.4 1680.51,1276.32 1680.51,1436.19 1747.49,1503.17 1747.49,1597.88 1877,1727.4 1877,1952 PWM1.13@1911.43,1986.43
"ENC A": ENCA.1 R19.2 U1.53 | length 2101.5
  Top Layer w10: v1(680,1330) 680,1325.94 683.81,1322.13 683.81,1259.72 708.64,1234.89 U1.53
  Bottom Layer w10: R19.2 1537.4,547.4 ENCA.1
  Bottom Layer w12: v1(680,1330) 611,1330 580.5,1299.5 580.5,910.46 732.96,758 913.96,758 1136.78,980.82 1196.91,980.82 1229.29,948.44 1294.24,948.44 1343,899.68 1343,749.77 1406.88,685.89 1414.11,685.89 ENCA.1
"ENC B": ENCB.1 R20.2 U1.54 | length 1637.9
  Top Layer w10: v1(640,1295) 640,1274.6 U1.54
  Bottom Layer w10: v1(640,1295) 605,1295 599.5,1289.5 599.5,1239.44 600,1238.94 600,917.83 740.83,777 906.09,777 1128.91,999.82 1252.78,999.82 1259.15,993.45 R20.2 ; R20.2@1262.6,996.89 1278.27,1012.56 1293.35,1012.56 1311.35,1030.56 1444.34,1030.56 1484.9,990 ENCB.1
"ENC Z": R21.2 U1.55 | length 1567.8
  Top Layer w10: v1(625,1250) 627.87,1247.13 639.63,1247.13 U1.55
  Bottom Layer w12: v1(625,1250) 619,1244 619,925.7 748.7,796 898.22,796 1140.71,1038.5 1292.42,1038.5 1303.48,1049.56 1487.7,1049.56 1493.14,1055 R21.2@1625,1055
GND: 5V.2 24V.2 C1.1 C2.1 C3.1 C4.1 C5.1 C6.2 C7.1 C8.2 C9.1 C10.1 C11.1 C12.2 C13.2 D1.2 Gnd1.1 Gnd2.1 J1.3 J1.5 J1.9 J2.1 J3.1 J4.1 J5.1 J6.1 J8.1 P2.6 P2.8 P2.10 P2.12 P2.14 P2.16 PWM1.1 PWM1.1a PWM1.1b PWM1.14 PWM1.15 R7.1 R17.2 S1.1 S1.2 SW1.5 SW1.6 SW1.7 SW1.8 U1.10 U1.17 U1.49 U1.57 U2.2 U2.8 U3.3 U4.3 U5.3 Y1.2 | length 6032.1
  Top Layer w10: U1.57 652.97,1177.01 677.8,1152.18 677.8,1126.54 662,1110.74 662,1079.26 665,1076.26 ; U1.10 741.76,905 ; U1.49 835,1218.79 ; 841.21,795 U1.17
  Top Layer w20: 665,1076.26 836.26,905 ; 741.76,905 836.26,905 ; 835,1218.79 923.01,1130.79 923.01,1096.99 v2(925,1095) 841.21,1011.21 841.21,905 ; SW1.8 940,625 841.21,723.79 841.21,795 841.21,905 ; R17.2 1823.07,2004.33 1823.07,1987.65 1825,1985.73 PWM1.15 ; 836.26,905 841.21,905
  Top Layer w25: v2(569.45,1720) 569.45,1685 589.27,1665.18 643.33,1665.18 U3.3 750.81,1659.96 789.02,1698.18 921.02,1698.18 959.23,1659.96 U4.3 1073.31,1659.96 1111.52,1698.18 1225,1698.18 ; SW1.5 SW1.6 SW1.7 SW1.8 ; v1(1240,1713.18) 1225,1698.18 ; R7.1 1327.4,378.11 1335.57,369.94 1342.46,369.94 1400,312.4 1400,145 1375.04,120.04 1347.87,120.04 J1.9 1346.08,116.08 1598.92,116.08 5V.2 1600,117.95 5V.2@1590.85,127.11 ; 24V.2 1490.79,1767.05 1481.63,1757.89 1467.89,1757.89 1369.96,1659.96 U5.3 1281.73,1659.96 1243.52,1698.18 1225,1698.18
  Bottom Layer w20: v2(569.45,1720) 649.02,1640.43 C9.1 C9.1@750.91,1640.43 ; J2.1 1276.89,587.71 1373,491.6 1373,382.43 1461.46,293.98 1461.46,288.07 1474.09,275.43 C8.2@1475.91,275.43 ; C6.2 v1(1390,2355) ; C8.2 C8.2@1475.91,275.43 ; C8.2@1488.54,288.07 C8.2@1475.91,275.43
  Bottom Layer w25: J3.1 800.43,79.57 C5.1 ; C1.1 C2.1 C3.1 C4.1 C12.2 ; C10.1 1149.55,1640.43 1222.3,1713.18 v1(1240,1713.18) 1301.35,1713.18 1374.09,1640.43 C11.1 ; v2(1115,2090) 1115,2135 Y1.2 ; Y1.2@1120,2155 Y1.2 ; U2.8 Y1.2 ; U2.2 1520,2105 C7.1 1525,2120 v2(1525,2195) ; C13.2 1885.14,1544.43 1925.12,1544.43 1946.71,1522.84 S1.1
  Bottom Layer w50: C3.1 v2(925,1095) ; D1.2 1863.29,1347.12 1863.29,1430.22 S1.1
  other v2: 320,1800 1020,1915 1515,2360 1390,2500 1420,2900
"LED CAN": CAN.1 U1.6 | length 702.4
  Top Layer w10: CAN.1 193.4,443 592.13,841.73 592.13,865.63 625.13,898.62 U1.6
  Top Layer w20: CAN.1@143.03,444.97 CAN.1@154.69,456.62
"LED DEBUG": "DEBUG 1.2" U1.5 | length 612.2
  Top Layer w10: 141.34,570 267.56,570 U1.5
"LED DEBUG2": "DEBUG 2.2" U1.4 | length 548.8
  Top Layer w8: U1.4@597.29,926.18 U1.4
  Top Layer w10: 140,710 379.73,710 U1.4
"LED ERROR": ERROR.2 U1.3 | length 484.2
  Top Layer w10: ERROR.2 484.89,843 U1.3
"LED FAULT": FAULT.2 PWM1.10 U1.33 | length 2005
  Top Layer w10: U1.33 1145.92,1142.13 1167.13,1142.13 v1(1170,1145)
  Top Layer w20: v1(1620,1320) 1653.66,1286.34 FAULT.2
  Bottom Layer w20: v1(1170,1145) 1445,1145 v1(1620,1320) 1624.51,1324.51 1624.51,2029.51 1896.43,2301.43 1920.43,2301.43 PWM1.10
"LIM 1": R22.2 U1.8 | length 253.1
  Top Layer w8: U1.8@652.97,869.37 U1.8
  Top Layer w10: v1(620,750) 628.13,758.13 628.13,845.95 U1.8@652.26,870.08
  Bottom Layer w20: R22.2 590,652.4 590,720 v1(620,750)
"LIM 2": R23.2 U1.7 | length 352.7
  Top Layer w10: v1(594.61,785.39) 610.13,800.92 610.13,855.79 639.05,884.7 U1.7
  Bottom Layer w20: R23.2 429.52,651.92 461.13,651.92 v1(594.61,785.39)
"MOTOR PWM": PWM1.12 PWM.1 U1.37 | length 1778.8
  Top Layer w10: U1.37 1028.79,1135.25 1003.96,1110.42 1003.96,1099.65 1033.85,1069.77 1061.69,1041.93 1076.93,1041.93 1140,1105 v1(1170,1105)
  Bottom Layer w20: v1(1170,1105) 1469.6,1105 1652.51,1287.91 1652.51,1542.51 1773,1662.99 PWM.1 1773,1925.88 1770,1928.88 1770,1975 1913,2118 PWM1.12
Net5V_1: 5V.1 R12.1 | length 170.6
  Top Layer w20: v1(1685,180) 1685,155.16 1710.08,130.08 1710.08,126.65 5V.1
  Bottom Layer w20: v1(1685,180) 1712,153 1712,139.6 1704.96,132.56 1698.07,132.56 1687.4,121.89 R12.1
Net24V_1: 24V.1 R11.1 | length 729.7
  Top Layer w20: 24V.1 1589.21,1845.14 1684.04,1939.97 1684.04,2139.04 v1@1685,2140
  Bottom Layer w20: R11.1 1655,2170 v1@1685,2140
  other v1: 1685,2139.32
NetC12_1: C12.1 U1.48 | length 346
  Top Layer w10: U1.48 950,1363.79 v1(950,1367.36)
  Bottom Layer w25: C12.1 779.57,1354.92 794.21,1369.57 947.79,1369.57 v1(950,1367.36)
NetC13_1: C13.1 R5.1 S1.3 S1.4 | length 468.7
  Top Layer w20: R5.1 1602.4,1700 S1.4
  5V w20: S1.4 S1.3
  Bottom Layer w20: C13.1 1880.91,1625.43 1955.47,1700 S1.3
NetCAN_2: CAN.2 R10.1 | length 126.3
  Top Layer w10: v1(45,500) 60.36,484.64 CAN.2
  Bottom Layer w10: v1(45,500) 59.37,485.63 R10.1
NetCLK_1: CLK.1 U1.45 Y1.3 | length 1043.5
  Top Layer w10: U1.45 1044.73,1375 CLK.1
  Bottom Layer w20: Y1.3@938.9,2155 938.9,1431.1 993.9,1431.1 CLK.1
"NetDEBUG 1_1": "DEBUG 1.1" R13.1 | length 127.1
  Top Layer w10: v1(45,630) 62.32,612.68 62.32,593 62.32,573
  Bottom Layer w10: v1(45,630) 59.37,615.63 R13.1
"NetDEBUG 2_1": "DEBUG 2.1" R14.1 | length 133.1
  Top Layer w10: v1(40,770) 57.32,752.68 57.32,710
  Bottom Layer w10: v1(40,770) 54.37,755.63 R14.1
NetERROR_1: ERROR.1 R16.1 | length 132.1
  Top Layer w10: v1(40,900) 57.32,882.68 ERROR.1
  Bottom Layer w10: v1(40,900) 54.37,885.63 R16.1
NetFAULT_1: FAULT.1 R15.1 | length 331.9
  Top Layer w20: v1(1785,975) 1785,1138.66 FAULT.1 FAULT.1@1850,1205
  Bottom Layer w20: v1(1785,975) R15.1
NetJ1_2: J1.2 R6.1 U1.20 | length 762
  Top Layer w10: U1.20 969.73,750 977.36,750
  Top Layer w25: 977.36,750 1182.4,544.96 R6.1 1178.07,380.67 1178.07,338.07 1145,305 J1.2@1145,170
NetJ1_4: J1.4 R7.2 U1.21 | length 825.1
  Top Layer w10: U1.21 972.06,775.5 987.93,775.5 988.43,775 1010,775
  Top Layer w25: 1010,775 1252.6,532.4 R7.2 1252.6,327.6 1195,270 J1.4@1195,170
NetJ1_10: J1.10 R8.1 | length 82.6
  Bottom Layer w25: J1.10@1345,170 R8.1
NetJ2_3: J2.3 R19.1 | length 406.9
  Bottom Layer w12: J2.3 1351,685.89 1351,623.66 1393.9,580.76 1423.11,580.76 1466.01,537.86 1466.01,453.41 R19.1
NetJ2_4: J2.4 R20.1 | length 305.6
  Bottom Layer w20: R20.1 1337.4,983.11 1348.07,972.44 1368.55,972.44 1443,897.99 1443,808 J2.4
NetJ2_5: J2.5 R21.1 | length 421.6
  Top Layer w10: J2.5 1334.19,878.11 1377.19,921.11 1412.81,921.11 1413.92,920 v1@1625,920
  Bottom Layer w10: v1(1625,917.4) R21.1
NetJ3_2: "LIM 1.1" J3.2 R22.1 | length 653.7
  Bottom Layer w25: R22.1 585,390 630,345 653.11,345 J3.2 763.49,234.62 934.62,234.62 975,275
NetJ4_2: "LIM 2.1" J4.2 R23.1 | length 363.2
  Bottom Layer w25: R23.1@419.07,566.67 R23.1@420.93,564.82 ; R23.1 426.89,567.6 435.06,559.43 435.06,552.54 470,517.6 470,430 470,420.53 450,400.53 J4.2
NetJ8_3: J8.3 R24.1 | length 189.1
  Top Layer w20: J8.3 359.88,1291.77 R24.1@359.88,1347.28
  Top Layer w25: R24.1@359.88,1347.28 R24.1
NetP1_2: P1.2 R9.1 | length 343.6
  Top Layer w20: P1.2 1248.43,1793.43 1263.92,1793.43 1323.09,1852.6 1495,1852.6 1522.44,1880.04 1522.44,1886.93 1533.11,1897.6 R9.1
NetPWM1_2: PWM1.2 PWM1.2a PWM1.2b Saber.2A Saber.2B | length 906.2
  Top Layer w50: Saber.2B Saber.2A ; PWM1.2 PWM1.2@768,2155
  5V w20: Saber.2A Saber.2A@458.51,2060.12
  5V w50: Saber.2B Saber.2A ; PWM1.2 PWM1.2@767,2160
  GND w50: Saber.2B Saber.2A ; PWM1.2 PWM1.2@768,2155
  Bottom Layer w100: Saber.2B Saber.2A 435.12,2060.12 533,2158 PWM1.2
NetPWM1_3: PWM1.3 PWM1.3a PWM1.3b Saber.1A Saber.1B | length 500.8
  Top Layer w50: Saber.1B Saber.1A
  5V w50: Saber.1B Saber.1A
  GND w50: Saber.1B Saber.1A
  Bottom Layer w100: Saber.1B Saber.1A
NetPWM1_16: PWM1.16 R17.1 | length 114.2
  Top Layer w25: PWM1.16 1725,1985.3 1729.43,1989.72 1729.43,2006.83 R17.1
NetR1_2: R1.2 SW1.1 | length 253.3
  Top Layer w10: v1(645,625) SW1.1
  Bottom Layer w20: v1(645,625) 695,675 R1.2
NetR2_2: R2.2 SW1.2 | length 241.1
  Top Layer w10: v1(645.39,574.61) 645.79,575 SW1.2
  Bottom Layer w20: v1(645.39,574.61) 791.93,574.61 802.6,585.27 R2.2
NetR3_2: R3.2 SW1.3 | length 238
  Top Layer w10: v1(645.39,524.61) 645.79,525 SW1.3
  Bottom Layer w20: v1(645.39,524.61) 720.39,524.61 735,510 R3.2
NetR4_2: R4.2 SW1.4 | length 252.5
  Top Layer w10: v1(645.39,474.61) 645.79,475 SW1.4
  Bottom Layer w20: v1(645.39,474.61) 695,425 R4.2
NetR25_2: R25.2 TX.1 | length 82.6
  Bottom Layer w20: R25.2 TX.1
NetR26_2: R26.2 RX.1 | length 84.7
  Bottom Layer w20: R26.2 1945,795 RX.1
NetR27_2: R27.2 U3.4 | length 99.5
  Top Layer w20: R27.2 552.36,1530.04 U3.4
NetU3_2: U3.2 U4.4 | length 192.4
  Top Layer w25: U3.2@841.46,1654.96 853.27,1654.96 858.48,1649.74 858.48,1637.93 954.02,1542.4 954.02,1535.26 959.23,1530.04 U4.4
NetU4_2: U4.2 U5.4 | length 197.4
  Top Layer w25: U4.2 1175.77,1659.96 1180.98,1654.74 1180.98,1642.93 1276.52,1547.4 1276.52,1535.26 1281.73,1530.04 U5.4
POT: POT.1 R24.2 U1.2 | length 565.9
  Top Layer w10: 507.7,907.3 514.77,907.3 515.47,908 522.05,908 U1.2
  Top Layer w20: R24.2 437.4,1343.11 455,1325.51 POT.1 455,1249.18 440,1234.18 440,975 507.7,907.3
RESET: R5.2 R8.2 U1.47 | length 2096.2
  Top Layer w10: v1(1165,914.32) 1165,940 1096.93,1008.07 1061.93,1008.07 967.96,1102.04 967.96,1122.04 864.76,1225.23 864.76,1249.62 889.6,1274.45 U1.47 890.55,1275.55 956.86,1341.86 960.56,1341.86 975.5,1356.79 975.5,1361.31 1032.19,1418 1220.76,1418 1221.76,1417 1439.04,1417 1600,1577.96 1600,1620.71 1593.11,1627.6 R5.2
  Bottom Layer w20: v1(1165,914.32) 1165,908.65 1188.89,884.76 1188.89,745.05 1165,721.16 1165,660 1345,480 R8.2
"RGB ARRAY": R27.1 TP1.1 U1.64 | length 474.8
  Top Layer w10: R27.1 546.37,1457.6 530.7,1441.93 530.7,1106.61 555.53,1081.78 U1.64
  Top Layer w20: TP1.1 472.6,1457.6 R27.1@546.37,1457.6
URX: R26.1 U1.12 | length 1632.7
  Top Layer w10: v1(655,725) 674.5,744.5 674.5,782.06 U1.12
  Top Layer w12: v1@1230,710 1415,710 1545,840 v1(1745,840)
  Bottom Layer w12: v1(655,725) 680,700 703.04,700 719.6,716.56 929.08,716.56 1126.13,913.61 1126.81,913.61 1154.02,940.82 1175.98,940.82 1212.89,903.91 1212.89,810.11 1220,803 v1(1220,710) ; v1(1745,840) 1747.6,840 1771.04,816.56 1777.93,816.56 1792.6,801.89 R26.1
UTX: R25.1 U1.13 | length 1410.4
  Top Layer w10: v1(700,740) 697.73,742.27 697.73,776.36 722.56,801.19 U1.13
  Top Layer w12: v1@1290,815 1405,815 1480,890 1700,890 v1(1755,945)
  Bottom Layer w12: v1@708,738 922.24,738 1145.06,960.82 1184.26,960.82 1232.89,912.19 1232.89,829.43 1242.32,820 v1(1280,820) ; v1(1755,945) 1771.04,928.96 1771.04,911.56 R25.1@1777.93,911.56
VCC: C1.2 C2.2 C3.2 C4.2 C5.2 C6.1 C7.2 C8.1 D1.1 F1.1 J1.1 J2.2 R6.2 R10.2 R12.2 R13.2 R14.2 R15.2 R16.2 U1.11 U1.26 U1.50 U1.56 U2.3 U2.5 VCC1.1 VCC2.1 Y1.1 Y1.4 | length 4056.5
  Top Layer w10: U1.56 700,1158.92 700,1105 v2(705,1100) ; U1.11 695.83,830.13 720.66,854.96 731.43,854.96 760.86,825.53 789.14,825.53 795,831.39 v2(795,835) ; U1.50 785,1240.95 785,1235 790,1230 ; v2(930,940) 939.57,930.43 956.33,930.43 U1.26 U1.26@1000.95,884.7
  Top Layer w20: v2(705,1100) 795,1190 795,1225 790,1230 ; R6.2 1107,384.4 1107,151.43 1131.26,127.17 1135,127.17 J1.1
  Bottom Layer w20: C5.2 1029.72,140.71 1078.54,140.71 1095,124.25 1137.91,124.25 J1.1 1155,107.17 1155,103.43 1179.26,79.17 1360.74,79.17 1395,113.43 1395,115 R12.2 1612.6,121.89 1601.93,132.56 1595.04,132.56 1535.67,191.93 1492.64,191.93 C8.1 ; U2.5@1239.9,2003.19 1245,2003.19 U2.5@1243.19,2005 ; U2.5 U2.5@1243.19,2005 ; C6.1 1248.28,2353.72 1248.28,2311.72 1390,2170 1390,2061.38 1398.19,2053.19 ; v2(1345,1935) 1350,1940 1350,2005 ; C8.1@1470,204.57 C8.1@1475.91,204.57 ; C7.2 1519.13,2055 U2.3 1447.52,2053.19 1398.19,2053.19 ; U2.5@1243.19,2005 1350,2005 ; 1350,2005 1398.19,2053.19
  Bottom Layer w25: R13.2@129.18,593 R14.2 R16.2 129.18,844.89 137.34,853.06 144.23,853.06 165.36,874.18 v2(165.36,913) ; R10.2 R13.2 ; C1.2 C2.2 C3.2 779.57,1096.18 C4.2 ; Y1.4 1044.45,2355 ; 1045,2354.45 1044.45,2355 ; C6.1 Y1.1 1044.45,2355 ; D1.1 1869.67,1167.99 1899.67,1137.99 1899.67,1126.5 1934.8,1091.36 R15.2
  Bottom Layer w50: v2(225,2465) 239.06,2465 293.51,2519.45 293.51,2520.63 298.82,2525.94 F1.1 ; v2(705,1100) 706.46,1098.54 777.2,1098.54 C3.2@779.57,1096.18 ; v2(1710,1150) 1799.88,1150 1800.38,1150.49 1840.67,1150.49 D1.1
VREF: J8.2 U1.1 VREF.1 | length 770.2
  Top Layer w10: v2(507.5,1000) 510,1000 547.46,962.54 548.74,962.54 U1.1
  Top Layer w25: VREF.1 55,1176.89 J8.2
  Bottom Layer w25: J8.2 231.89,1000 v2(507.5,1000)
pads on no net: J1.6 J1.7 J1.8 J2. J2.6 J2.7 J3. J4. J5.9 J6. J6.7 J8. J8.4 J8.7 P1.1 P2.2 PWM1.5 PWM1.6 PWM1.7 PWM1.8 PWM1.9 PWM1.11 Saber. U1.9 U1.14 U1.15 U1.16 U1.18 U1.19 U1.22 U1.23 U1.24 U1.25 U1.31 U1.32 U1.34 U1.35 U1.36 U1.41 U1.42 U1.43 U1.44 U1.46 U1.51 U1.52 U1.58 U1.59 U1.60 U1.61 U1.62 U1.63 U5.2

## Polygon pours and split planes (outlines as drawn)
VCC on 5V "5V-VCC" (solid, pour order 36): 0,5 5,0 2000,0 2000,3000 0,3000
NetPWM1_3 on 5V "5V-NetPWM1_3" (solid, pour order 34): 885,2445 649.84,2445 444.92,2649.92 225,2395 225,2255 518.75,2255 885,2255
NetPWM1_2 on 5V "5V-NetPWM1_2" (solid, pour order 26): 885,2255 225,2255 225,1810 600,1810 600,2060 630,2090 885,2090
GND on 5V "Top Layer-GND" (solid, pour order 20): 450,2775 1125,2775 1210,2860 1335,2860 1335,2465 945,2075 625,2075 625,1805 1085,1805 1590,2310 1590,2990 450,2990
24V on 5V "Top Layer-24V" (solid, pour order 12): 450,2800 1125,2800 1210,2885 1335,2885 1335,2690 1095,2450 655,2450 450,2655
no net on 5V "5V-No Net 1" (solid, pour order 60): 0,5
no net on 5V "5V-No Net" (solid, pour order 56): 2250,2730
GND on Top Layer "Top Layer-GND" (solid, pour order 30): 450,2775 1125,2775 1210,2860 1335,2860 1335,2465 945,2075 625,2075 625,1805 1085,1805 1590,2310 1590,2990 450,2990
NetPWM1_3 on Top Layer "Top Layer-NetPWM1_3" (solid, pour order 50): 885,2445 649.84,2445 444.92,2649.92 225,2395 225,2255 518.75,2255 885,2255
NetPWM1_2 on Top Layer "Top Layer-NetPWM1_2" (solid, pour order 48): 885,2255 225,2255 225,1810 600,1810 600,2060 630,2090 885,2090
24V on Top Layer "Top Layer-24V" (solid, pour order 16): 450,2800 1125,2800 1210,2885 1335,2885 1335,2690 1095,2450 655,2450 450,2655
no net on Top Layer "Top Layer-No Net 2" (solid, pour order 46): 1115,2685
no net on Top Layer "Top Layer-No Net" (solid, pour order 40): 1580,1505
no net on Top Layer "Top Layer-No Net 1" (solid, pour order 38): 450,2745
GND on GND "GND-GND" (solid, remove dead copper, pour order 62): 0,0 2000,0 2000,3000 0,3000
24V on GND "Top Layer-24V" (solid, pour order 24): 450.79,2790 1120.79,2790 1210.79,2880 1335.79,2880 1335.79,2685 1095.79,2445 655.79,2445 450.79,2650
NetPWM1_2 on GND "GND-NetPWM1_2" (solid, pour order 32): 885,2255 225,2255 225,1810 600,1810 600,2060 630,2090 885,2090
NetPWM1_3 on GND "GND-NetPWM1_3" (solid, pour order 58): 885,2445 649.84,2445 444.92,2649.92 225,2395 225,2255 518.75,2255 885,2255
24V on Bottom Layer "Top Layer-24V" (solid, pour order 54): 450.79,2805 1135.79,2805 1210.79,2880 1335.79,2880 1335.79,2685 1095.79,2445 655.79,2445 450.79,2650
GND on Bottom Layer "Bottom Layer-GND" (solid, pour order 64): 1415,2820 1480,2755 1530,2755 1590,2815 1590,2990 1060,2990 15,2990 15,1770 80,1705 910,1705 910,2050 905,2055 680,2055 505,1880 200,1880 200,2750 285,2885 465,2885 465,2815 515,2810 525,2820
no net on Bottom Layer "Bottom Layer-No Net" (solid, pour order 66): 1415,2820

## Silkscreen, mask and mechanical layers (free items; w line width, h text height)
Top Overlay:
  drawing of 79 lines, arcs and shapes, not listed
  text "PSoC Motor Unit Rev 3.0 / By: Austin H. Chan" at 1915,350 h33 r90
Mechanical 1:
  the board outline again, w10

## Text inside footprints (layer, text, board x,y; h text height)
U1: Top Overlay "64" at 510.99,1100.66 h19.68 r45; Top Overlay "49" at 723.83,1313.5 h19.68 r45; Top Overlay "48" at 915.46,1315.62 h19.68 r45; Top Overlay "33" at 1126.88,1105.61 h19.68 r45; Top Overlay "32" at 1124.06,916.11 h19.68 r45; Top Overlay "17" at 908.39,697.61 h19.68 r45; Top Overlay "16" at 721.87,702.19 h19.68 r45